# EAGLE board PCB (EAGLE 9.7.0)
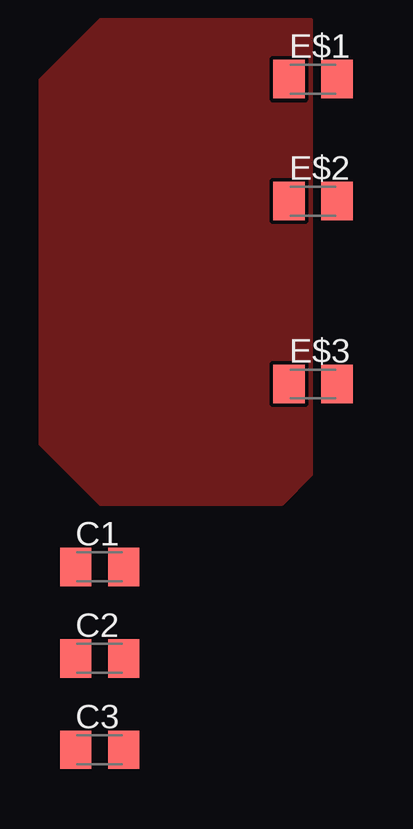
[diagram p0: board, top side]

No outline drawn. Coordinates in mm, seen from the top.
Copper layers (1*16): Top 0.035mm / dielectric 1.5mm / Bottom 0.035mm
Design rules "default": minimum track width 6mil, minimum drill 0.35mm, track to track 6mil, track to pad 6mil, pad to pad 6mil, via to via 6mil, smd to smd 6mil, copper to edge 40mil, drill to drill 6mil, minimum pad ring 10mil, minimum via ring 8mil, stop-mask expansion 4mil, vias tented up to drill 0mil, thermal gap 10mil

## Footprints (pad centres in the part's own frame; a part is rotated, then mirrored left to right if it is on the bottom)
C0805K = smd 1.3 x 1.6: 1 -1,0; 2 1,0

## Placement (x,y rotation side)
C1  [C0805K]  -11.43,-13.97 0 top
C2  [C0805K]  -11.43,-17.78 0 top
C3  [C0805K]  -11.43,-21.59 0 top
E$1  [C0805K]  -2.54,6.35 0 top
E$2  [C0805K]  -2.54,1.27 0 top
E$3  [C0805K]  -2.54,-6.35 0 top

## Library data of the parts
C1-C3 = rcl; SPICEPREFIX: C
E$1-E$3 = rcl

## Tracks (layer width: path | path; a pad name or v marks a point on that pad's centre or on a via)
GND
  pour Top: -2.54,8.89 -11.43,8.89 -13.97,6.35 -13.97,-8.89 -11.43,-11.43 -3.81,-11.43 -2.54,-10.16